# Altium PCB Filter_Bank_EVB.PcbDoc (part 2 of 2)
Units mil, origin at the board's own origin, x right, y up, seen from the top; angles counter-clockwise.
Board outline 1783.46 x 1173.23 mil, 4 copper layers (Top Layer, Mid-Layer 1, Mid-Layer 2, Bottom Layer), stack 62.205 mil thick; 71 components, 40 nets, 242 pads, 1145 vias.
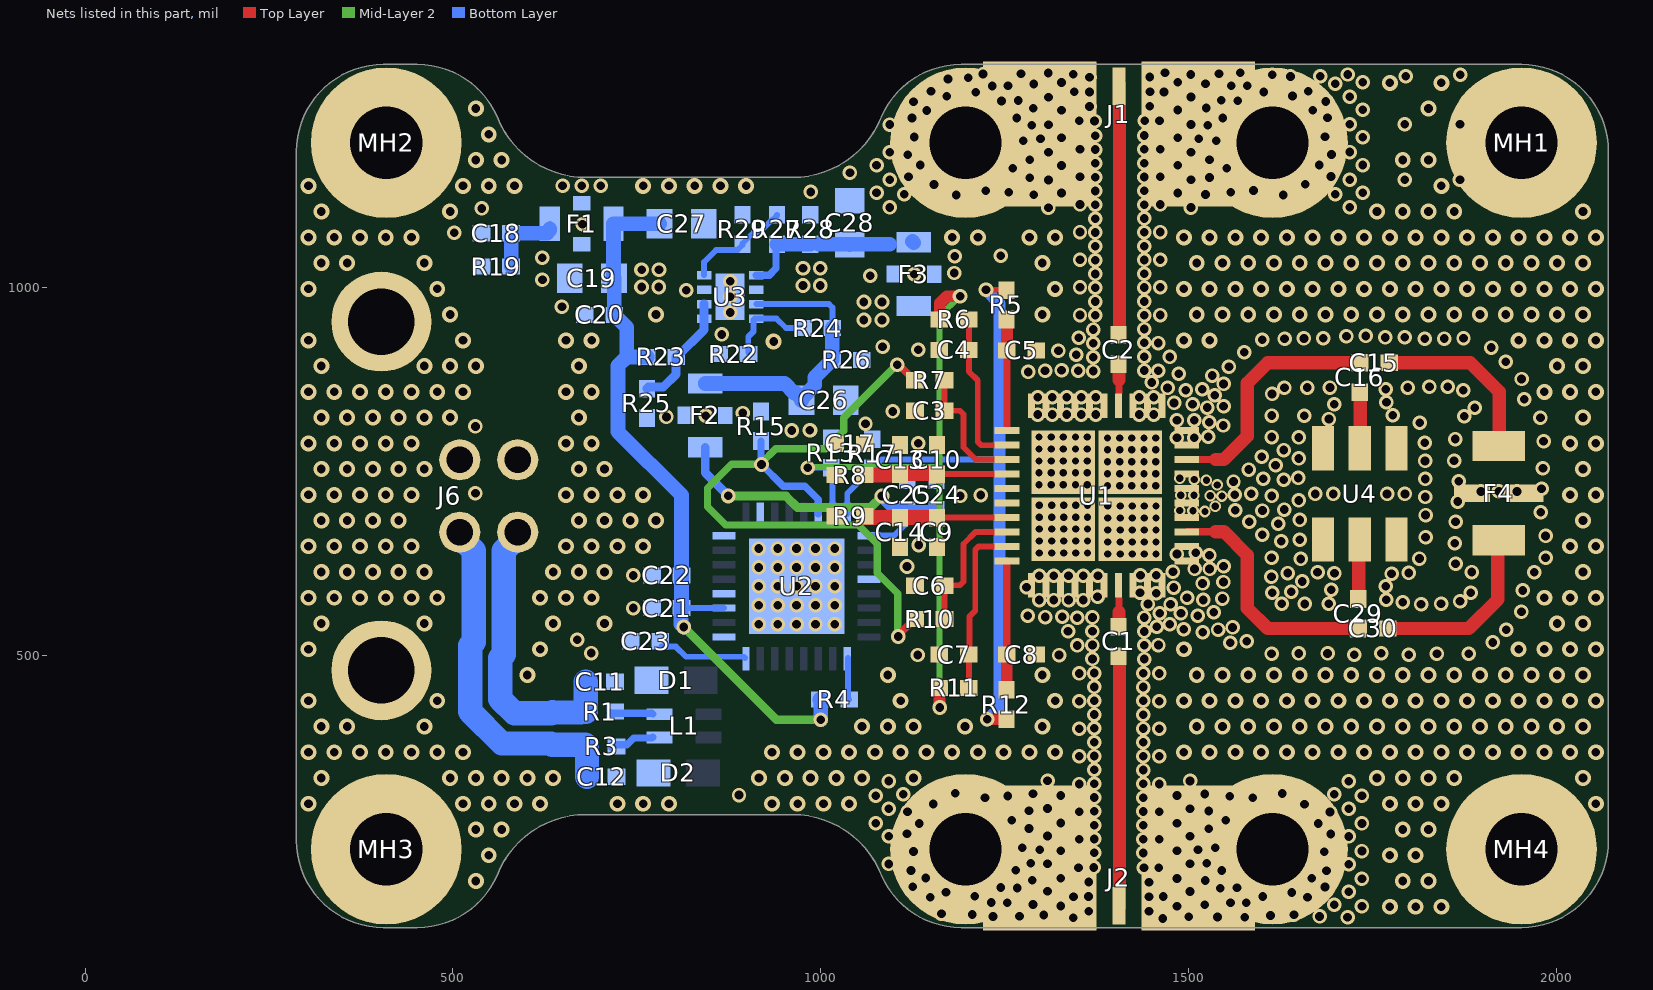
[diagram p4: the nets of this part, all layers, seen from the top]

## Via types
v1: diameter 19.68, hole 11.81, Top Layer to Bottom Layer, tented both sides, 562 vias
v2: diameter 21.68, hole 11.81, Top Layer to Bottom Layer, tented both sides, 377 vias
v3: diameter 15.75, hole 9.84, Top Layer to Bottom Layer, tented both sides, 112 vias
v4: diameter 19.68/19.68/19.68/19.68 (per signal layer), hole 11.81, Top Layer to Bottom Layer, tented both sides, 66 vias
v5: diameter 20.08, hole 11.81, Top Layer to Bottom Layer, tented both sides, 28 vias

## Nets (pads, with @x,y where several pads share a name; then routed paths per layer and width w, separated by ;. In a path a pad name is that pad's centre, name@x,y a point inside that pad or via, vN(x,y) a via of type N, cw(c..) or ccw(c..) an arc to the next point about the centre after c; other vN are vias at no path point) (continued)
GND: C3.2 C4.2 C5.2 C6.1 C7.1 C8.1 C9.1 C10.2 C11.1 C12.1 C13.1 C14.1 C17.2 C18.1 C19.1 C20.1 C21.1 C22.1 C23.1 C24.1 C25.1 C26.1 C27.1 C28.1 D1.2 D2.2 F1.2 F1.4 F2.2 F2.4 F3.2 F3.4 F4.2 F4.4 J1.2 J2.2 J6.4 J6.Shell MH1.1 MH2.1 MH3.1 MH4.1 R13.2 R15.2 R17.2 R22.2 R25.1 R26.1 R28.1 R29.2 U1.5 U1.6 U1.11 U1.12 U1.13 U1.14 U1.15 U1.16 U1.18 U1.19 U1.20 U1.21 U1.22 U1.24 U1.25 U1.26 U1.27 U1.29 U1.30 U1.31 U1.32 U1.33 U1.35 U1.36 U1.37 U1.38 U1.39 U1.40 U1.41 U1.42 U1.43 U1.44 U2.4 U2.17 U2.20 U2.24 U2.26 U2.33 U3.3 U3.9 U4.1 U4.3 U4.4 U4.6
  other v1: 1465.05,142.17 1343.18,143.04 1539.38,144.23 1576.55,144.01 1716.25,143.93 1234.28,144.86 1270.43,145.35 1500.28,144.74 1678.16,144.94 1611.56,146.23 1206.05,147.51 1303.32,147.05 1643.44,147.15 1164.22,148.77 1364.28,152.06 1446.32,151.85 1735.87,158.66 1326.27,159.17 1484.33,158.96 1288.59,161.26 1522.01,161.05 1698.2,160.75 1253.49,163.65 1557.11,163.44 1232,163.98 1578.6,163.77 1148.88,171.17 1343.65,171.65 1661.72,170.96 1209.5,172.42 1364.22,172.13 1446.38,171.93 1465.61,172.05 1601.11,172.21 1640.21,177.55 1170.39,177.76 1718.08,178.54 1308.48,179.05 1502.13,178.84 1267.45,183.67 1543.15,183.46 1244.66,184.23 1565.94,184.03 1125.09,185.28 1685.51,185.07 1446.26,191.61 1364.34,191.82 1287.63,194.03 1522.97,193.82 1484.33,196.54 1735.87,196.24 1142.82,197.18 1326.27,196.75 1667.79,196.97 1122.88,207.5 1265.2,207.59 1545.4,207.38 1687.72,207.29 1350.52,211.07 1371.09,211.56 1439.52,211.35 1459.52,211.07 1092.52,216.33 1308.48,216.63 1502.13,216.42 1718.08,216.12 1285.74,217.43 1524.86,217.22 1371.92,231.51 1438.69,231.3 1126.22,233.19 1684.39,232.98 1326.27,234.33 1484.33,234.12 1735.87,233.82 1512.95,235.48 1297.65,235.69 1274.2,238.53 1536.4,238.32 1351.35,249.81 1371.92,250.3 1438.69,250.09 1460.35,249.81 1092.52,253.91 1308.48,254.21 1502.13,254.01 1718.08,253.7 1117.27,257.27 1693.33,257.06 1283.21,264.42 1527.4,264.21 1371.92,269.09 1438.69,268.88 1074.73,271.61 1134.1,271.45 1676.51,271.24 1735.87,271.4 1326.27,271.91 1484.33,271.7 1259.86,275.95 1550.75,275.74 1118.11,287.13 1351.35,287.39 1438.69,287.67 1460.35,287.39 1692.49,286.92 1283.25,288.62 1371.92,287.88 1527.36,288.41 1092.52,291.5 1502.13,291.59 1718.08,291.29 1308.48,291.8 1657.66,297.69 1152.95,297.9 1223.28,306.34 1371.92,306.67 1438.69,306.46 1587.32,306.13 1254.51,308.59 1556.09,308.38 1074.73,309.2 1326.27,309.5 1484.33,309.29 1735.87,308.99 1112.4,311.29 1288.59,311.59 1522.01,311.38 1698.2,311.08 1183.05,312.25 1627.55,312.04 1351.35,324.98 1371.92,325.46 1438.69,325.25 1460.35,324.98 1092.52,329.08 1308.48,329.38 1502.13,329.17 1718.08,328.87 1371.92,344.25 1438.69,344.05 1351.35,362.56 1460.35,362.56 1371.92,363.05 1438.69,362.84 1438.69,381.63 1371.92,381.84 1351.35,400.14 1371.92,400.63 1438.69,400.42 1460.35,400.14 1371.92,419.42 1438.69,419.21 1351.35,437.72 1371.92,438.21 1438.69,438 1460.35,437.72 1371.92,457 1438.69,456.79 1351.35,475.31 1438.69,475.58 1460.35,475.31 1371.92,475.79 1369.49,495.07 1440,494.87 1725.46,500.75 1799.38,500.74 1612.99,502.3 1650.02,502.45 1689.11,502.45 1762.25,502.57 1837.75,502.1 1880.97,502.1 1348.92,513.38 1440,513.66 1369.49,513.86 1459.24,513.87 1556.61,517.08 1913.72,517.51 1579.33,519.06 1519.55,531.2 1336.25,532.68 1369.49,532.65 1440,532.46 1493.58,535.23 1540.22,534.98 1931.89,534.89 1559.89,537.83 1456.94,538.77 1474.72,542.13 1348.92,550.96 1369.49,551.44 1440,551.25 1305.16,551.95 1328.54,552.21 1512.74,553.63 1281.52,553.75 1460.78,557.04 1489.8,557.16 1534.2,558.44 1952.6,559.31 1475.69,569.26 1816.18,569.48 1444.91,569.7 1626.91,570 1657.99,569.83 1690.59,570.17 1843.35,570.03 1791.48,571.95 1869.15,573.33 1296.99,575.1 1316.99,575.1 1336.99,575.1 1356.99,575.1 1520.15,575.24 1768.91,575.44 1546.2,577.1 1498.12,578.27 1376.36,579.75 1455.99,584.45 1434.1,584.92 1613.87,585.07 1883.87,584.87 1639.54,586.18 1954.56,588.19 1694.02,589.1 1279.81,592.34 1479.92,592.11 1768.21,593.75 1519.11,597.63 1547.49,599.62 1654.6,600.33 1612.74,606.58 1296.99,608.27 1316.99,608.27 1336.99,608.27 1356.99,608.27 1376.99,608.27 1456.08,608.65 1434.68,608.89 1698.46,611.46 1776.1,610.88 1634.97,611.75 1799.43,611.93 1675.46,612.8 1884.97,613.14 1970,612.88 1478.94,613.75 1508.31,617.37 1528.69,617.37 1547.74,620.83 1863.05,624.33 1652.49,631 1813.93,631.47 1612.92,632.57 1985.44,632.59 1528.47,636.17 1484.29,637.59 1509.79,639.29 1861.96,652.39 1626.31,655.07 1651.2,656.9 1822.28,660.32 1985.44,662.19 1600.27,663.79 1622.06,678.6 1582.65,681.54 1863.05,681.55 1651.35,684.01 1822.3,690.65 1978.81,694.56 1563.53,697.22 1600.51,696.75 1630.28,698.16 1866.2,708.99 1649.79,710.5 1822.05,715.18 1613.27,716.59 1563.05,718.42 1672.32,719.34 1696.72,719.34 1769.92,719.34 1794.32,719.34 1585.21,719.71 1897.55,722.68 1922.07,722.68 1946.6,722.68 1980.02,726.3 1561.2,736.16 1867.39,736.67 1629.43,738.42 1601.65,740.12 1821.8,739.7 1649.38,741.11 1581.77,752.5 1981.92,754.4 1618.37,758.26 1821.55,764.23 1861.03,764.49 1649.93,767.61 1599.48,770.08 1629.43,778.96 1821.3,788.75 1982.67,790.88 1862.51,793.96 1484.29,795.77 1507.91,795.77 1613.01,796.62 1649.75,796.12 1526.79,796.98 1547.08,812.36 1814.25,816 1528.11,816.81 1484.29,819.39 1507.91,819.39 1690.96,821.17 1978.44,822.87 1657.19,825.57 1874.84,824.79 1613.11,825.85 1777.64,826.5 1295.31,827.26 1314.99,827.26 1334.68,827.26 1354.36,827.26 1374.05,827.26 1433.1,827.26 1452.79,827.26 1889.16,836.42 1525.6,836.82 1547.66,838.66 1505.51,841.27 1698.32,841.33 1480.35,843.01 1769.11,843.77 1956.6,847.97 1295.31,850.88 1314.99,850.88 1334.68,850.88 1354.36,850.88 1374.05,850.88 1433.1,850.88 1452.79,850.88 1535.79,853.53 1613.57,855.21 1496.4,860.27 1873.71,860.49 1518.73,861.53 1768.13,861.58 1471.54,863.43 1630.52,863.72 1661.42,863.91 1692.38,863.91 1798.29,863.92 1827.59,865.21 1852.59,864.89 1547.7,868.86 1450.29,870.9 1952.76,875.59 1532.23,880.28 1486.74,882.84 1282.19,885.12 1305.02,886.69 1370.69,886.4 1327.5,887.56 1350.12,886.88 1439.89,887.09 1459.12,886.88 1555.07,892.33 1931.29,899.04 1370.69,905.19 1474.71,905.57 1439.89,905.88 1347.32,908.61 1576,911.94 1911.45,918.35 1370.69,923.98 1439.89,924.67 1459.12,924.47 1600.37,929.06 1630.64,930.22 1656.98,930.65 1821.2,930.15 1847.54,930.58 1350.78,931.6 1683.32,931.09 1873.88,931.02 1767.66,932.02 1794,932.46 1714.73,933.69 1741.07,934.12 1370.69,942.77 1439.89,943.47 1352.55,962.53 1373.12,962.05 1439.89,962.26 1461.55,962.53 1373.12,980.84 1439.89,981.05 1373.12,999.63 1352.55,1000.12 1439.89,999.84 1461.55,1000.12 1373.12,1018.42 1439.89,1018.63 1373.12,1037.21 1439.89,1037.42 1352.55,1037.7 1461.55,1037.7 1373.12,1056 1439.89,1056.21 1352.55,1075.28 1373.12,1074.79 1439.89,1075 1461.55,1075.28 1373.12,1093.59 1439.89,1093.79 1309.68,1108.46 1503.33,1108.67 1093.72,1108.76 1719.28,1108.97 1373.12,1112.38 1439.89,1112.59 1352.55,1112.86 1461.55,1112.86 1184.25,1125.6 1113.6,1126.55 1289.79,1126.25 1523.21,1126.46 1628.75,1125.8 1699.4,1126.76 1075.93,1128.64 1327.47,1128.34 1485.54,1128.55 1255.71,1129.25 1557.29,1129.46 1737.07,1128.85 1224.48,1131.5 1373.12,1131.17 1439.89,1131.38 1588.52,1131.71 1154.15,1139.94 1658.86,1140.15 1093.72,1146.34 1309.68,1146.04 1503.33,1146.25 1719.28,1146.55 1793.86,1146.55 1869.02,1146.55 1284.45,1149.22 1528.56,1149.43 1352.55,1150.45 1373.12,1149.96 1439.89,1150.17 1461.55,1150.45 1119.31,1150.71 1693.69,1150.92 1261.06,1161.89 1551.95,1162.1 1075.93,1166.23 1135.3,1166.39 1327.47,1165.93 1485.54,1166.14 1677.71,1166.6 1737.07,1166.44 1373.12,1168.75 1439.89,1168.96 1284.41,1173.42 1528.6,1173.63 1118.47,1180.57 1694.53,1180.78 1309.68,1183.63 1093.72,1183.93 1503.33,1183.83 1719.28,1184.14 1373.12,1187.54 1352.55,1188.03 1439.89,1187.75 1461.55,1188.03 1275.4,1199.31 1537.6,1199.52 1298.85,1202.15 1514.15,1202.36 1327.47,1203.51 1127.42,1204.65 1485.54,1203.72 1737.07,1204.02 1685.59,1204.86 1373.12,1206.33 1439.89,1206.54 1286.94,1220.41 1526.06,1220.62 1093.72,1221.51 1309.68,1221.21 1503.33,1221.42 1719.28,1221.72 1793.86,1221.72 1869.02,1221.72 1372.29,1226.28 1440.72,1226.49 1351.72,1226.77 1460.72,1226.77 1124.08,1230.34 1266.4,1230.25 1546.6,1230.46 1688.92,1230.55 1144.02,1240.66 1327.47,1241.09 1485.54,1241.3 1668.99,1240.87 1737.07,1241.6 1288.83,1243.81 1524.17,1244.02 1365.54,1246.02 1447.46,1246.23 1126.29,1252.56 1245.86,1253.61 1686.71,1252.77 1268.65,1254.17 1544.35,1254.38 1567.14,1253.81 1309.68,1258.79 1503.33,1259 1719.28,1259.3 1171.59,1260.08 1641.41,1260.29 1210.7,1265.42 1602.31,1265.63 1150.08,1266.67 1344.85,1266.19 1365.42,1265.71 1447.58,1265.91 1466.81,1265.79 1662.92,1266.88 1233.2,1273.86 1254.69,1274.19 1558.31,1274.4 1579.8,1274.07 1289.79,1276.58 1523.21,1276.79 1699.4,1277.09 1327.47,1278.67 1485.54,1278.88 1737.07,1279.18 1173.23,1283.46 1200.5,1284.97 1365.48,1285.78 1447.52,1285.99 1638.67,1286.82 1679.02,1287.21 1795.16,1287.18 1503.26,1289.42 1613.7,1289.32 1716.67,1289.51 1869.48,1289.32 1220.76,1290.11 1343.52,1289.81 1541.55,1290.67 1272.46,1290.72 1309.35,1291.63 1468.11,1291.93 1570.42,1291.72
  other v2: 1773.78,158.19 1808.78,158.19 1843.78,158.19 531.28,193.19 1791.28,193.19 1826.28,193.19 548.78,228.19 1773.78,228.19 1808.78,228.19 531.28,263.19 566.28,263.19 1791.28,263.19 1826.28,263.19 303.78,298.19 513.78,298.19 548.78,298.19 583.78,298.19 618.78,298.19 723.78,298.19 758.78,298.19 793.78,298.19 933.78,298.19 968.78,298.19 1003.78,298.19 1038.78,298.19 1773.78,298.19 1808.78,298.19 1843.78,298.19 2053.78,298.19 321.28,333.19 496.28,333.19 531.28,333.19 566.28,333.19 601.28,333.19 636.28,333.19 916.28,333.19 951.28,333.19 986.28,333.19 1021.28,333.19 1056.28,333.19 1126.28,333.19 1756.28,333.19 1791.28,333.19 1826.28,333.19 1861.28,333.19 2036.28,333.19 303.78,368.19 338.78,368.19 373.78,368.19 408.78,368.19 443.78,368.19 478.78,368.19 513.78,368.19 933.78,368.19 968.78,368.19 1003.78,368.19 1038.78,368.19 1073.78,368.19 1108.78,368.19 1143.78,368.19 1178.78,368.19 1213.78,368.19 1248.78,368.19 1283.78,368.19 1318.78,368.19 1493.78,368.19 1528.78,368.19 1563.78,368.19 1598.78,368.19 1633.78,368.19 1668.78,368.19 1703.78,368.19 1738.78,368.19 1773.78,368.19 1808.78,368.19 1843.78,368.19 1878.78,368.19 1913.78,368.19 1948.78,368.19 1983.78,368.19 2018.78,368.19 2053.78,368.19 321.28,403.19 356.28,403.19 461.28,403.19 1056.28,403.19 1091.28,403.19 1126.28,403.19 1196.28,403.19 1301.28,403.19 1511.28,403.19 1546.28,403.19 1581.28,403.19 1616.28,403.19 1651.28,403.19 1686.28,403.19 1721.28,403.19 1756.28,403.19 1791.28,403.19 1826.28,403.19 1861.28,403.19 1896.28,403.19 1931.28,403.19 1966.28,403.19 2001.28,403.19 2036.28,403.19 303.78,438.19 478.78,438.19 1108.78,438.19 1318.78,438.19 1493.78,438.19 1528.78,438.19 1563.78,438.19 1598.78,438.19 1633.78,438.19 1668.78,438.19 1703.78,438.19 1738.78,438.19 1773.78,438.19 1808.78,438.19 1843.78,438.19 1878.78,438.19 1913.78,438.19 1948.78,438.19 1983.78,438.19 2018.78,438.19 2053.78,438.19 601.28,473.19 1091.28,473.19 1301.28,473.19 1511.28,473.19 1546.28,473.19 1581.28,473.19 1616.28,473.19 1651.28,473.19 1686.28,473.19 1721.28,473.19 1756.28,473.19 1791.28,473.19 1826.28,473.19 1861.28,473.19 1896.28,473.19 1931.28,473.19 1966.28,473.19 2001.28,473.19 2036.28,473.19 303.78,508.19 618.78,508.19 1493.78,508.19 1948.78,508.19 1983.78,508.19 2018.78,508.19 2053.78,508.19 321.28,543.19 461.28,543.19 636.28,543.19 706.28,543.19 2001.28,543.19 2036.28,543.19 303.78,578.19 338.78,578.19 373.78,578.19 408.78,578.19 443.78,578.19 478.78,578.19 618.78,578.19 653.78,578.19 688.78,578.19 1983.78,578.19 2018.78,578.19 2053.78,578.19 321.28,613.19 356.28,613.19 391.28,613.19 426.28,613.19 461.28,613.19 636.28,613.19 671.28,613.19 706.28,613.19 2036.28,613.19 303.78,648.19 338.78,648.19 373.78,648.19 408.78,648.19 443.78,648.19 653.78,648.19 688.78,648.19 723.78,648.19 758.78,648.19 2018.78,648.19 2053.78,648.19 321.28,683.19 356.28,683.19 391.28,683.19 426.28,683.19 671.28,683.19 706.28,683.19 741.28,683.19 776.28,683.19 2036.28,683.19 303.78,718.19 338.78,718.19 373.78,718.19 408.78,718.19 443.78,718.19 653.78,718.19 688.78,718.19 723.78,718.19 758.78,718.19 2018.78,718.19 2053.78,718.19 321.28,753.19 356.28,753.19 391.28,753.19 426.28,753.19 461.28,753.19 671.28,753.19 706.28,753.19 2036.28,753.19 303.78,788.19 338.78,788.19 373.78,788.19 408.78,788.19 443.78,788.19 653.78,788.19 688.78,788.19 2018.78,788.19 2053.78,788.19 321.28,823.19 356.28,823.19 391.28,823.19 426.28,823.19 461.28,823.19 496.28,823.19 671.28,823.19 2036.28,823.19 303.78,858.19 338.78,858.19 373.78,858.19 408.78,858.19 443.78,858.19 478.78,858.19 513.78,858.19 653.78,858.19 688.78,858.19 1983.78,858.19 2018.78,858.19 2053.78,858.19 321.28,893.19 461.28,893.19 496.28,893.19 531.28,893.19 671.28,893.19 2001.28,893.19 2036.28,893.19 936.04,926.49 303.78,928.19 513.78,928.19 653.78,928.19 688.78,928.19 1493.78,928.19 1528.78,928.19 1948.78,928.19 1983.78,928.19 2018.78,928.19 2053.78,928.19 496.28,963.19 776.28,963.19 1301.28,963.19 1511.28,963.19 1546.28,963.19 1581.28,963.19 1616.28,963.19 1651.28,963.19 1686.28,963.19 1721.28,963.19 1756.28,963.19 1791.28,963.19 1826.28,963.19 1861.28,963.19 1896.28,963.19 1931.28,963.19 1966.28,963.19 2001.28,963.19 2036.28,963.19 303.78,998.19 478.78,998.19 1318.78,998.19 1493.78,998.19 1528.78,998.19 1563.78,998.19 1598.78,998.19 1633.78,998.19 1668.78,998.19 1703.78,998.19 1738.78,998.19 1773.78,998.19 1808.78,998.19 1843.78,998.19 1878.78,998.19 1913.78,998.19 1948.78,998.19 1983.78,998.19 2018.78,998.19 2053.78,998.19 321.28,1033.19 356.28,1033.19 461.28,1033.19 1301.28,1033.19 1511.28,1033.19 1546.28,1033.19 1581.28,1033.19 1616.28,1033.19 1651.28,1033.19 1686.28,1033.19 1721.28,1033.19 1756.28,1033.19 1791.28,1033.19 1826.28,1033.19 1861.28,1033.19 1896.28,1033.19 1931.28,1033.19 1966.28,1033.19 2001.28,1033.19 2036.28,1033.19 303.78,1068.19 338.78,1068.19 373.78,1068.19 408.78,1068.19 443.78,1068.19 1178.78,1068.19 1213.78,1068.19 1283.78,1068.19 1318.78,1068.19 1493.78,1068.19 1528.78,1068.19 1563.78,1068.19 1598.78,1068.19 1633.78,1068.19 1668.78,1068.19 1703.78,1068.19 1738.78,1068.19 1773.78,1068.19 1808.78,1068.19 1843.78,1068.19 1878.78,1068.19 1913.78,1068.19 1948.78,1068.19 1983.78,1068.19 2018.78,1068.19 2053.78,1068.19 321.28,1103.19 496.28,1103.19 1756.28,1103.19 1791.28,1103.19 1826.28,1103.19 1861.28,1103.19 2036.28,1103.19 303.78,1138.19 513.78,1138.19 548.78,1138.19 583.78,1138.19 758.78,1138.19 793.78,1138.19 828.78,1138.19 863.78,1138.19 898.78,1138.19 1843.78,1138.19 531.28,1173.19 566.28,1173.19 1791.28,1173.19 1826.28,1173.19 548.78,1208.19 531.28,1243.19 1826.28,1243.19 1773.78,1278.19 1843.78,1278.19
  other v3: 1390.39,637.83 1407.18,637.83 1423.59,637.83 1439.99,637.83 1456,637.83 1297.28,639.01 1314.07,639.01 1330.49,639.01 1346.88,639.01 1362.89,639.01 1390.39,654.12 1407.18,654.12 1423.59,654.12 1439.99,654.12 1456,654.12 1297.28,655.3 1314.07,655.3 1330.49,655.3 1346.88,655.3 1362.89,655.3 1390.39,670.4 1407.18,670.4 1423.59,670.4 1439.99,670.4 1456,670.4 1297.28,671.58 1314.07,671.58 1330.49,671.58 1346.88,671.58 1362.89,671.58 1390.39,686.57 1407.18,686.57 1423.59,686.57 1439.99,686.57 1456,686.57 1297.28,687.75 1314.07,687.75 1330.49,687.75 1346.88,687.75 1362.89,687.75 1522.38,695.44 1506.18,696.56 1488.3,696.7 1536.52,702.63 1390.39,702.86 1407.18,702.86 1423.59,702.86 1439.99,702.86 1456,702.86 1297.28,704.04 1314.07,704.04 1330.49,704.04 1346.88,704.04 1362.89,704.04 1545.48,716.44 1489.52,717.55 1507.4,717.42 1529.57,716.99 1389.83,730.52 1406.62,730.52 1423.04,730.52 1439.43,730.52 1455.44,730.52 1539.18,731.66 1296.73,731.7 1313.52,731.7 1329.93,731.7 1346.32,731.7 1362.33,731.7 1524.4,737.88 1507.81,738.95 1488.22,740.65 1389.83,746.8 1406.62,746.8 1423.04,746.8 1439.43,746.8 1455.44,746.8 1296.73,747.98 1313.52,747.98 1329.93,747.98 1346.32,747.98 1362.33,747.98 1389.83,763.09 1406.62,763.09 1423.04,763.09 1439.43,763.09 1455.44,763.09 1296.73,764.27 1313.52,764.27 1329.93,764.27 1346.32,764.27 1362.33,764.27 1389.83,779.26 1406.62,779.26 1423.04,779.26 1439.43,779.26 1455.44,779.26 1296.73,780.44 1313.52,780.44 1329.93,780.44 1346.32,780.44 1362.33,780.44 1389.83,795.54 1406.62,795.54 1423.04,795.54 1439.43,795.54 1455.44,795.54 1296.73,796.72 1313.52,796.72 1329.93,796.72 1346.32,796.72 1362.33,796.72
  other v4: 889,310 1132.13,500.4 1324.02,500.31 688,503 669,521 915.76,542.16 941.5,542.16 967.25,542.16 992.99,542.16 1019.32,542.16 745.04,564.24 915.76,567.91 941.5,567.91 967.25,567.91 992.99,567.91 1019.32,567.91 915.76,593.65 941.5,593.65 967.25,593.65 992.99,593.65 1019.32,593.65 745.04,608.53 915.76,619.39 941.5,619.39 967.25,619.39 992.99,619.39 1019.32,619.39 915.76,645.14 941.5,645.14 967.25,645.14 992.99,645.14 1019.32,645.14 1189.57,716.54 1217.74,717.78 530.71,720.47 1132.49,788.33 530.71,811.02 1060.95,814.83 790.33,823.97 843.73,825.79 894.25,829.36 1097.85,831.42 1323.19,914.19 1132.46,915.35 1084.1,919.35 865.59,936.1 876.97,966.09 648.31,973.63 876.97,987.21 817.37,996.43 876.97,1008.32 621.82,1010.64 1067.52,1015.75 1127.19,1017.95 1181.69,1019.69 621.37,1040.42 1182.32,1042.65 1244.68,1043.31 501.86,1074.48 676.32,1085.76 539.27,1107.41 986.65,1129.8 649.19,1138.26 675.07,1138.26 700.96,1138.26 1039.81,1155.85
  other v5: 1117.4,620.66 1133.44,649.8
NetC3_1: C3.1 R7.2 U1.3 | length 180.1
  Top Layer w8: R7.2@1168.34,873.77 C3.1@1168.34,832.39 1189.5,832.39 1194.18,827.7 1194.18,782.79 1210.73,766.24 U1.3@1253.38,766.24
NetC4_1: C4.1 R6.2 U1.2 | length 216.9
  Top Layer w8: R6.2@1201.41,956.54 C4.1@1201.41,915.21 1201.41,885.79 1213.52,873.69 1213.52,790.24 1218.21,785.55 U1.2@1257.17,785.55
NetC5_1: C5.1 R5.2 U1.1 | length 150.2
  Top Layer w10: C5.1@1253.23,914.37 1253.23,805.76 U1.1@1253.38,805.61
  Top Layer w16: C5.1@1253.23,914.37 R5.2@1253.23,955.71
NetC6_2: C6.2 R10.2 U1.8 | length 190.8
  Top Layer w8: R10.2@1168.34,549.21 C6.2@1168.34,594.49 1169.09,595.24 1189.5,595.24 1194.18,599.93 1194.18,651.26 1210.73,667.81 U1.8@1253.38,667.81
NetC7_2: C7.2 R11.2 U1.9 | length 240.2
  Top Layer w8: R11.2@1201.41,451.99 C7.2@1201.41,500.99 1202.14,501.71 1202.14,552.41 1210.18,560.45 1210.18,643.44 1214.87,648.13 U1.9@1253.38,648.13
NetC8_2: C8.2 R12.2 U1.10 | length 172.9
  Top Layer w10: R12.2@1252.44,453.19 R12.2@1252.56,453.07 ; C8.2@1252.99,500.87 C8.2@1253.1,500.99 1253.1,628.17 U1.10@1253.38,628.44
  Top Layer w16: R12.2@1252.99,455.82 C8.2@1252.99,500.87
NetC9_2: C9.2 C14.2 R9.2 U1.7 | length 195.9
  Top Layer w8: C14.2@1107.93,687.2 C14.2@1108.23,687.5 ; C9.2@1158.07,687.2 1158.37,687.5 U1.7@1253.38,687.5
  Top Layer w20: R9.2@1057.96,687.2 C14.2@1107.93,687.2 ; C14.2@1108.01,687.2 C9.2@1158.07,687.2
NetC10_1: C10.1 C13.2 R8.2 U1.4 | length 191.9
  Top Layer w8: C10.1@1158.07,747.84 1159.36,746.55 U1.4@1253.38,746.55
  Top Layer w20: R8.2@1062.48,745.08 C13.2@1107.13,745.08 ; C13.2@1107.93,745.87 C13.2@1109.1,747.05 ; C13.2@1108.93,747.05 C13.2@1109.1,747.05 ; C10.1@1158.07,745.87 1158.07,746.05 1157.07,747.05 C13.2@1109.1,747.05
NetC18_2: C18.2 F1.1 R19.1 | length 106.8
  Bottom Layer w8: R19.1@579.05,1028.37 R19.1@579.37,1028.69 ; F1.1@622.11,1069.71 626.22,1073.82 631.89,1079.49 F1.1@631.89,1086.62
  Bottom Layer w20: R19.1@579.37,1028.69 579.37,1069.71 C18.2@580.37,1070.71 ; 592.34,1073.82 626.22,1073.82 628.11,1073.82 631.89,1077.6 F1.1@631.89,1079.49
NetC23_2: C23.2 U2.16 | length 119.6
  Bottom Layer w8: C23.2@783.78,511.81 803.15,511.81 816.93,498.03 895.48,498.03 U2.16@897.01,496.5
NetC26_2: C26.2 F2.1 R24.2 R26.2 U3.7 | length 391.6
  Bottom Layer w8: U3.7@912.4,977.36 1011.25,977.36 1015.94,972.68 R24.2@1015.94,944.88
  Bottom Layer w20: F2.1@843.06,869.51 950.88,869.51 963.94,856.46 966.44,856.46 C26.2@973.94,848.96 ; R24.2@1015.94,944.88 1015.84,944.79 1015.84,901.67 1014.84,901.67 1013.75,900.58 1013.75,899.58 992.13,877.95 992.13,867.15 C26.2@973.94,848.96 ; C26.2@973.94,848.96 C26.2@973.94,846.46 C26.2@973.94,848.96
NetC28_2: C28.2 F3.1 R27.2 R28.2 U3.5 | length 205.3
  Bottom Layer w10: U3.5@912.4,1016.73 930.12,1016.73 939.3,1025.91 R27.2@939.3,1055.98 ; F3.1@1126.38,1061.68 F3.1@1126.6,1061.46
  Bottom Layer w20: R27.2@940.58,1058.83 R28.2@985.75,1058.83 ; 997.56,1058.83 1094.06,1058.83 ; C28.2@1039.47,1058.08 C28.2@1039.65,1057.91 ; F3.1@1124.93,1062.56 F3.1@1126.54,1060.95
NetL1_1: L1.1 R3.1 | length 61.6
  Bottom Layer w10: R3.1@715.8,374.88 719.15,378.23 736.65,378.23 746.02,387.61 770.48,387.61 L1.1@771.65,388.78
NetL1_4: L1.4 R1.1 | length 58.6
  Bottom Layer w10: R1.1@713.83,422.12 714.75,421.2 770.73,421.2 L1.4@771.65,420.28
NetR4_2: R4.2 U2.9 | length 57.2
  Bottom Layer w8: U2.9@1037.04,496.5 1037.04,441.62 R4.2@1038.7,439.96
NetR22_1: R22.1 R24.1 U3.8 | length 120.7
  Bottom Layer w8: R22.1@901.57,911.51 901.57,933.07 908.45,939.95 908.45,955.77 910.36,957.68 939.96,957.68 952.76,944.88 R24.1@975.94,944.88
NetR23_2: R23.2 R25.2 U3.1 U3.2 | length 159.3
  Bottom Layer w12: R25.2@763.78,862.52 765.75,864.49 785.75,864.49 803.46,882.21 R23.2@803.46,905.51 804.46,905.51 841.54,942.58 U3.1@841.54,957.68 U3.2@841.54,977.36
NetR27_1: R27.1 R29.1 U3.4 | length 145.2
  Bottom Layer w8: U3.4@841.54,1016.73 841.54,1034.45 857.92,1050.83 886.7,1050.83 893.7,1057.83 893.7,1059.83 908.7,1074.83 916.58,1074.83 932.58,1090.83 933.58,1090.83 940.58,1097.83 R27.1@940.58,1098.83
RF1_1: C1.2 U1.17 | length 37.7
  Top Layer w10: 1405.61,558.8 1405.61,576.5
  Top Layer w18: C1.2@1405.61,538.8 1405.61,558.8
RF1_2: C1.1 J2.1 | length 342.1
  Top Layer w18: C1.1@1405.61,498.8 1406.15,498.26 J2.1@1406.15,156.88
RF2_1: C2.1 U1.34 | length 38.3
  Top Layer w10: 1405.51,857.34 1405.55,857.38 1405.55,874.51 ; C2.1@1405.55,895.5 C2.1@1405.61,895.56
  Top Layer w18: 1405.55,874.51 C2.1@1405.55,895.5
RF2_2: C2.2 J1.1 | length 341.5
  Top Layer w18: C2.2@1405.61,935.56 1406.15,936.1 J1.1@1406.15,1276.88
RFAUX2_1: C15.2 C16.2 U1.28 | length 330.1
  Top Layer w10: U1.28@1498.07,766.24 1536.63,766.24
  Top Layer w18: 1536.63,766.24 1548.3,766.24 1579.92,797.85 1579.92,870.08 1607.48,897.64 C16.2@1731.46,897.64
RFAUX2_2: C16.1 U4.5 | length 76.2
  Top Layer w18: U4.5@1733.46,781.48 C16.1@1733.46,857.64
RFAUX2_3: C15.1 F4.3 | length 239.1
  Top Layer w18: C15.1@1773.46,897.64 1883.07,897.64 1922.44,858.27 F4.3@1922.44,784.47
RFAUX_1: C29.2 C30.1 U1.23 | length 330.1
  Top Layer w10: U1.23@1498.07,667.81 1536.63,667.81
  Top Layer w18: 1536.63,667.81 1548.3,667.81 1579.92,636.2 1579.92,563.97 1607.48,536.41 C30.1@1731.46,536.41
RFAUX_2: C29.1 U4.2 | length 81.9
  Top Layer w8: U4.2@1731.46,655.48 U4.2@1733.46,657.48
  Top Layer w18: C29.1@1731.46,576.41 U4.2@1731.46,655.48
RFAUX_3: C30.2 F4.1 | length 239.1
  Top Layer w18: C30.2@1771.46,536.41 1881.07,536.41 1920.44,575.78 F4.1@1920.44,649.58
USB1_N: C11.2 J6.2 R1.2 | length 395.4
  Bottom Layer w33: J6.2@588.19,667.32 588.19,661.12 569.32,642.25 569.32,501.04 564.51,496.23 564.51,440.43 583.84,421.1 633.93,421.1 635.33,422.5 635.7,422.12 R1.2@673.83,422.12 ; R1.2@680.53,423.4 C11.2@680.53,464
USB1_P: C12.2 J6.3 R3.2 | length 470
  Bottom Layer w33: J6.3@509.45,667.32 509.45,661.12 528.32,642.25 528.32,518.02 523.51,513.21 523.51,423.45 566.86,380.1 633.42,380.1 634.97,378.55 R3.2@680.1,378.55 ; C12.2@682.5,335 R3.2@682.5,376.16
VBUS: J6.1 R19.2
VCC: C19.2 C20.2 C21.2 C22.2 C27.2 F1.3 R4.1 R23.1 U2.19 U3.6 | length 1009.5
  Mid-Layer 2 w12: v5(813.98,538.39) 939.96,412.4 v5(1000,412.4)
  Bottom Layer w8: C21.2@815.2,564.12 U2.19@868.82,564.12
  Bottom Layer w20: R23.1@764.46,905.51 R23.1@763.46,905.51 736.22,905.51 ; C27.2@781.02,1086.62 F1.3@718.5,1086.62 718.5,1013.27 C19.2@718.98,1012.8 719.23,1012.54 719.23,962.86 720.23,962.86 721.49,961.6 721.49,960.6 736.22,945.87 736.22,905.51 ; C22.2@810.5,611.25 810.96,610.79 810.96,568.36 810.03,567.43 810.19,567.26 810.19,542.17 v5(813.98,538.39) ; C22.2@810.96,611.72 810.96,717.59 724.41,804.14 724.41,893.7 736.22,905.51 ; R4.1@998.7,439.96 998.98,439.96 999.98,438.96 v5(1000,412.4)
  other v5: 756.6,1000.65 779.95,1000.65 975.95,1002.77 999.3,1002.77 756.6,1024 780.22,1024 975.95,1026.12 999.57,1026.12
VCONTA: R7.1 R10.1 R15.1 U2.30 | length 961.3
  Top Layer w10: v5(1104.06,895.06) 1106.05,895.06 1127.34,873.77 R7.1@1128.34,873.77 ; v5(1105.56,525.45) 1105.56,527.44 1127.34,549.21 R10.1@1128.34,549.21
  Mid-Layer 2 w10: v5@911.3,759.64 878.86,759.64 846.24,727.02 846.24,701.8 870.87,677.17 1051.18,677.17 1077.11,651.23 1077.11,611.86 1104.97,584 v5@1104.97,525.45 ; v5(919.54,759.35) 919.54,761.37 938.78,780.61 1006.81,780.61 1031.5,805.3 1031.5,823.08 v5@1103.47,895.06
  Bottom Layer w10: R15.1@918.92,791.39 v5@918.92,759.97 ; v5(919.54,759.35) v5@918.92,759.97 ; U2.30@996.77,692.08 996.69,692.15 996.69,711.82 978.63,729.88 949,729.88 v5@918.92,759.97
VCONTB: R6.1 R11.1 R13.1 U2.31 | length 926.5
  Top Layer w16: R11.1@1161.41,455.71 1161.71,455.41 1161.71,429.43 v5(1162.01,429.13) ; R6.1@1161.41,956.54 1162.01,957.14 1162.01,978.82 1171.38,988.19 v5(1189.57,988.19)
  Mid-Layer 2 w8: v5(982.34,755.02) 983.23,755.91 1161.42,755.91 ; v5@1161.42,429.13 1161.42,755.91 ; v5@1188.98,988.19 1161.42,960.63 1161.42,755.91
  Bottom Layer w8: v5(982.34,755.02) 1014.39,755.02 1016.11,753.31 1016.11,692.43 U2.31@1016.46,692.08
VCONTC: R5.1 R12.1 R17.1 U2.32 | length 910.3
  Top Layer w8: v5(1224.78,996.9) 1252.04,996.9 R5.1@1252.56,996.38
  Top Layer w16: v5(1226.56,412.93) 1252.42,412.93 R12.1@1252.56,413.07 R12.1@1252.87,413.39
  Bottom Layer w8: U2.32@1036.14,692.08 1036.14,719.82 1062.19,745.87 1063.19,745.87 1070.19,752.87 R17.1@1070.19,753.87 1070.19,754.87 1077.19,761.87 1078.19,761.87 1082.56,766.24 1242.99,766.24
  Bottom Layer w16: v5@1224.19,996.9 1242.99,978.11 1242.99,766.24 1242.99,428.95 v5@1225.27,411.23
VDD_FILTER: C17.1 F3.3 R8.1 R9.1
  other v5: 960.69,805.67 985.38,805.81 1058.76,955.81 1083.27,955.81 1058.76,980.32 1083.27,980.32
VDDIO: C24.2 C25.2 F2.3 U2.1 | length 462.7
  Mid-Layer 2 w12: v5@874.01,716.53 952.76,716.53 968.31,700.98 1068.18,700.98 1082.68,715.48 v5@1082.68,716.54
  Bottom Layer w8: U2.1@1065.67,662.55 1066.02,662.9 1099.91,662.9 1117.67,680.66 C25.2@1117.67,698.05
  Bottom Layer w12: F2.3@843.06,782.9 843.06,748.04 v5(874.39,716.71) ; v5@1082.68,716.54 1084.22,714.99 1084.22,711.55 1095.7,700.07 1115.65,700.07 C25.2@1117.67,698.05 C24.2@1157.48,698.05
  other v5: 1083.27,716.54
pads on no net: U2.2 U2.3 U2.5 U2.6 U2.7 U2.8 U2.10 U2.11 U2.12 U2.13 U2.18 U2.21 U2.22 U2.23 U2.25 U2.27 U2.28 U2.29

## Polygon pours and split planes (outlines as drawn)
GND on Mid-Layer 1 "Mid-Layer 1-GND" (solid, pour order 1): 405.51,129.92 451.85,129.92 ccw(c451.85,248.03) 560.1,200.79 cw(c681.1,153.54) 681.1,283.44 961.69,283.44 cw(c961.69,153.54) 1082.69,200.79 ccw(c1190.94,248.03) 1190.94,129.92 1484.25,129.92 1952.76,129.92 ccw(c1952.76,248.03) 2070.87,248.03 2070.87,1185.04 ccw(c1952.76,1185.04) 1952.76,1303.15 1952.75,1303.15 1190.94,1303.15 ccw(c1190.94,1185.04) 1082.69,1232.28 cw(c961.69,1279.53) 961.69,1149.63 681.1,1149.63 cw(c681.1,1279.53) 560.1,1232.28 ccw(c451.85,1185.04) 451.85,1303.15 405.51,1303.15 ccw(c405.51,1185.04) 287.4,1185.04 287.46,1090.55 287.46,248.03 287.4,248.03 ccw(c405.51,248.03)
GND on Mid-Layer 2 "Mid-Layer 2-GND" (solid, pour order 2): 405.51,129.92 451.85,129.92 ccw(c451.85,248.03) 560.1,200.79 cw(c681.1,153.54) 681.1,283.44 961.69,283.44 cw(c961.69,153.54) 1082.69,200.79 ccw(c1190.94,248.03) 1190.94,129.92 1484.25,129.92 1952.76,129.92 ccw(c1952.76,248.03) 2070.87,248.03 2070.87,1185.04 ccw(c1952.76,1185.04) 1952.76,1303.15 1952.75,1303.15 1190.94,1303.15 ccw(c1190.94,1185.04) 1082.69,1232.28 cw(c961.69,1279.53) 961.69,1149.63 681.1,1149.63 cw(c681.1,1279.53) 560.1,1232.28 ccw(c451.85,1185.04) 451.85,1303.15 405.51,1303.15 ccw(c405.51,1185.04) 287.4,1185.04 287.46,1090.55 287.46,248.03 287.4,248.03 ccw(c405.51,248.03)
GND on Bottom Layer "Bottom Layer-GND" (solid, pour order 3): 405.51,129.92 451.85,129.92 ccw(c451.85,248.03) 560.1,200.79 cw(c681.1,153.54) 681.1,283.44 961.69,283.44 cw(c961.69,153.54) 1082.69,200.79 ccw(c1190.94,248.03) 1190.94,129.92 1484.25,129.92 1952.76,129.92 ccw(c1952.76,248.03) 2070.87,248.03 2070.87,1185.04 ccw(c1952.76,1185.04) 1952.76,1303.15 1952.75,1303.15 1190.94,1303.15 ccw(c1190.94,1185.04) 1082.69,1232.28 cw(c961.69,1279.53) 961.69,1149.63 681.1,1149.63 cw(c681.1,1279.53) 560.1,1232.28 ccw(c451.85,1185.04) 451.85,1303.15 405.51,1303.15 ccw(c405.51,1185.04) 287.4,1185.04 287.46,1090.55 287.46,248.03 287.4,248.03 ccw(c405.51,248.03)
GND on Top Layer "Top Layer-GND" (solid, pour order 0): 405.51,129.92 451.85,129.92 ccw(c451.85,248.03) 560.1,200.79 cw(c681.1,153.54) 681.1,283.44 961.69,283.44 cw(c961.69,153.54) 1082.69,200.79 ccw(c1190.94,248.03) 1190.94,129.92 1484.25,129.92 1952.76,129.92 ccw(c1952.76,248.03) 2070.87,248.03 2070.87,1185.04 ccw(c1952.76,1185.04) 1952.76,1303.15 1952.75,1303.15 1190.94,1303.15 ccw(c1190.94,1185.04) 1082.69,1232.28 cw(c961.69,1279.53) 961.69,1149.63 681.1,1149.63 cw(c681.1,1279.53) 560.1,1232.28 ccw(c451.85,1185.04) 451.85,1303.15 405.51,1303.15 ccw(c405.51,1185.04) 287.4,1185.04 287.46,1090.55 287.46,248.03 287.4,248.03 ccw(c405.51,248.03)

## Other copper
Top Layer:
  region net VDD_FILTER: 947.22,793.6 980.87,793.6 1003.94,770.53 1003.94,677.17 1030.56,677.17 1031.37,677.98 1031.37,818.97 947.22,818.97
Mid-Layer 2:
  region net VCC: 972.44,984.25 930.03,1026.66 807.98,1026.66 807.09,1027.56 787.4,1007.87 744.09,1007.87 744.09,1060.91 981.5,1060.91 1015.75,1026.66 1015.75,984.25
  region net VDD_FILTER: 1098.42,992.13 1043.31,992.13 947.14,895.96 947.14,793.61 998.75,793.61 998.75,884.57 1055.12,940.95 1098.42,940.95
Bottom Layer:
  region net VDD_FILTER: 1043.31,940.95 1130.35,940.95 1150.63,961.22 1150.36,992.13 1043.31,992.13
  region net VBUS: 559.06,736.22 618.11,736.22 618.11,937.01 551.05,1004.06 551.05,1039.37 523.65,1039.37 523.78,948.66 559.05,913.39
  region net VCC: 718.5,1034.8 792.43,1035.12 792.43,988.19 719.23,988.19 719.23,1034.07
  region net VCC: 912.4,1002.59 935.05,1002.72 969.5,1037.18 1011.2,1037.18 1011.2,991.19 922.22,991.19 912.4,991.19

## Silkscreen, mask and mechanical layers (free items; w line width, h text height)
Top Overlay:
  lines w10: 1046.99,825.45 1086.56,804.64
Top Solder:
  circle w10: c551.18,1023.62 r39.37
  circle w10: c807.09,748.03 r39.37
  region: 287.46,1090.55 287.4,1185.04 cw(c405.51,1185.04) 405.51,1303.15 451.85,1303.15 cw(c451.85,1185.04) 560.1,1232.28 ccw(c681.1,1279.53) 681.1,1149.63 593.04,1149.63 ccw(c593.04,944.9) 472.31,1110.24 cw(c411.95,1192.91) 411.95,1090.55
  region: 287.4,248.03 ccw(c405.51,248.03) 405.51,129.92 451.85,129.92 ccw(c451.85,248.03) 560.1,200.79 cw(c681.1,153.54) 681.1,283.44 593.04,283.44 cw(c593.04,488.16) 472.31,322.83 472.31,322.82 ccw(c411.95,240.16) 411.95,342.52 287.46,342.52
  region: 961.69,283.44 cw(c961.69,153.54) 1082.69,200.79 ccw(c1190.94,248.03) 1190.94,129.92 1484.25,129.92 1952.76,129.92 ccw(c1952.76,248.03) 2070.87,248.03 2070.87,1185.04 ccw(c1952.76,1185.04) 1952.76,1303.15 1952.75,1303.15 1190.94,1303.15 ccw(c1190.94,1185.04) 1082.69,1232.28 cw(c961.69,1279.53) 961.69,1149.63 1018.26,1149.63 cw(c1018.26,944.9) 1138.99,1110.24 ccw(c1199.35,1192.91) 1199.35,1090.55 1814.96,1090.55 cw(c1814.96,893.7) 2011.81,893.7 2011.81,539.37 cw(c1814.96,539.37) 1814.96,342.52 1199.35,342.52 ccw(c1199.35,240.16) 1138.99,322.82 1138.99,322.83 cw(c1018.26,488.16) 1018.26,283.44
  region: 1814.58,489.35 1813.47,490.46 1813.47,583.82 1853.11,583.82 1863.11,593.82 1975.74,593.82 1975.74,562.7 1976.11,562.33 1901.22,487.44 1814.46,487.44
  region: 1814.06,945.98 1812.95,944.86 1812.95,851.5 1852.59,851.5 1862.59,841.5 1975.22,841.5 1975.22,872.62 1975.59,872.99 1900.7,947.88 1813.94,947.88
  region: 1535.54,542.55 1586.24,489.72 1698.96,489.72 1698.97,568.78 1698.94,576.88 1624.02,577.24 1624.02,653.62 1563.84,713.8 1563.13,713.09 1535.54,713.09
  region: 1535.45,888.98 1589.29,945.14 1698.8,945.14 1698.8,851.89 1624.6,851.89 1624.6,778.67 1564.42,718.49 1563.72,719.19 1535.45,719.19
  region: 1330.84,200.93 1477.72,200.81 1477.72,465.88 1330.84,465.89
  region: 1331.06,1233.35 1477.94,1233.47 1477.94,971.89 1331.06,971.87
  lines w10: 492.13,1023.62 551.18,1023.62 ; 551.18,964.57 551.18,1023.62 ; 551.18,1082.68 551.18,1023.62 ; 610.24,1023.62 551.18,1023.62 ; 748.03,748.03 807.09,748.03 ; 807.09,688.98 807.09,748.03 ; 807.09,807.09 807.09,748.03 ; 866.14,748.03 807.09,748.03
  text "3002" at 681.01,396.87 h60
Bottom Solder:
  region: 287.4,248.03 ccw(c405.51,248.03) 405.51,129.92 451.85,129.92 ccw(c451.85,248.03) 560.1,200.79 cw(c681.1,153.54) 681.1,283.44 593.04,283.44 cw(c593.04,488.16) 472.31,322.83 472.31,322.82 ccw(c411.95,240.16) 411.95,342.52 287.46,342.52
  region: 287.46,1090.55 287.4,1185.04 cw(c405.51,1185.04) 405.51,1303.15 451.85,1303.15 cw(c451.85,1185.04) 560.1,1232.28 ccw(c681.1,1279.53) 681.1,1149.63 593.04,1149.63 ccw(c593.04,944.9) 472.31,1110.24 cw(c411.95,1192.91) 411.95,1090.55
  region: 961.69,283.44 cw(c961.69,153.54) 1082.69,200.79 ccw(c1190.94,248.03) 1190.94,129.92 1484.25,129.92 1952.76,129.92 ccw(c1952.76,248.03) 2070.87,248.03 2070.87,1185.04 ccw(c1952.76,1185.04) 1952.76,1303.15 1952.75,1303.15 1190.94,1303.15 ccw(c1190.94,1185.04) 1082.69,1232.28 cw(c961.69,1279.53) 961.69,1149.63 1018.26,1149.63 cw(c1018.26,944.9) 1138.99,1110.24 ccw(c1199.35,1192.91) 1199.35,1090.55 1814.96,1090.55 cw(c1814.96,893.7) 2011.81,893.7 2011.81,539.37 cw(c1814.96,539.37) 1814.96,342.52 1199.35,342.52 ccw(c1199.35,240.16) 1138.99,322.82 1138.99,322.83 cw(c1018.26,488.16) 1018.26,283.44
  region: 1455.94,1002.29 1515,1002.29 1515,943.23 1455.94,943.23
  region: 1534.68,1002.29 1593.74,1002.29 1593.74,943.23 1534.68,943.23
  region: 1613.42,1002.29 1672.48,1002.29 1672.48,943.23 1613.42,943.23
  region: 1692.16,1002.29 1751.22,1002.29 1751.22,943.23 1692.16,943.23
  region: 1770.91,1002.29 1829.96,1002.29 1829.96,943.23 1770.91,943.23
  region: 1692.16,1081.03 1751.22,1081.03 1751.22,1021.97 1692.16,1021.97
  region: 1613.42,1081.03 1672.48,1081.03 1672.48,1021.97 1613.42,1021.97
  region: 1534.68,1081.03 1593.74,1081.03 1593.74,1021.97 1534.68,1021.97
  region: 1455.94,1081.03 1515,1081.03 1515,1021.97 1455.94,1021.97
  region: 1770.91,1081.03 1829.96,1081.03 1829.96,1021.97 1770.91,1021.97
Mechanical 1:
  lines w10: 287.4,248.03 ccw(c405.51,248.03) 405.51,129.92 451.85,129.92 ccw(c451.85,248.03) 560.1,200.79 cw(c681.1,153.54) 681.1,283.44 961.69,283.44 cw(c961.69,153.54) 1082.69,200.79 ccw(c1190.94,248.03) 1190.94,129.92 1326.77,129.92 1484.25,129.92 1952.76,129.92 ccw(c1952.76,248.03) 2070.87,248.03 2070.87,1185.04 ccw(c1952.76,1185.04) 1952.76,1303.15 1484.25,1303.15 1326.77,1303.15 1190.94,1303.15 ccw(c1190.94,1185.04) 1082.69,1232.28 cw(c961.69,1279.53) 961.69,1149.63 681.1,1149.63 cw(c681.1,1279.53) 560.1,1232.28 ccw(c451.85,1185.04) 451.85,1303.15 405.51,1303.15 ccw(c405.51,1185.04) 287.4,1185.04 287.46,1090.55 287.46,342.52 287.46,248.03
Mechanical 2:
  circle w2.5: c216.6,-55.12 r1.25
  lines w10: 287.4,248.03 ccw(c405.51,248.03) 405.51,129.92 451.85,129.92 ccw(c451.85,248.03) 560.1,200.79 cw(c681.1,153.54) 681.1,283.44 ; 287.46,248.03 287.46,342.52 ; 681.1,1149.63 cw(c681.1,1279.53) 560.1,1232.28 ccw(c451.85,1185.04) 451.85,1303.15 405.51,1303.15 ccw(c405.51,1185.04) 287.4,1185.04 287.46,1090.55 ; 961.69,283.44 cw(c961.69,153.54) 1082.69,200.79 ccw(c1190.94,248.03) 1190.94,129.92 1326.77,129.92 ; 961.69,1149.63 ccw(c961.69,1279.53) 1082.69,1232.28 cw(c1190.94,1185.04) 1190.94,1303.15 1326.77,1303.15 ; 287.46,342.52 287.46,1090.55 ; 287.46,342.52 411.95,342.52 cw(c411.95,240.16) 472.31,322.82 ccw(c593.04,488.16) 593.04,283.44 1018.26,283.44 ccw(c1018.26,488.16) 1138.99,322.83 cw(c1199.35,240.16) 1199.35,342.52 1326.77,342.52 1326.77,129.92 ; 287.46,1090.55 411.95,1090.55 ccw(c411.95,1192.91) 472.31,1110.24 cw(c593.04,944.9) 593.04,1149.63 1018.26,1149.63 cw(c1018.26,944.9) 1138.99,1110.24 ccw(c1199.35,1192.91) 1199.35,1090.55 1326.77,1090.55 1326.77,1303.15 ; 1326.77,129.92 1484.25,129.92 ; 1326.77,1303.15 1484.25,1303.15 ; 1484.25,129.92 1952.76,129.92 ccw(c1952.76,248.03) 2070.87,248.03 2070.87,1185.04 ccw(c1952.76,1185.04) 1952.76,1303.15 1484.25,1303.15 ; 1484.25,129.92 1484.25,342.52 1814.96,342.52 ccw(c1814.96,539.37) 2011.81,539.37 2011.81,893.7 ccw(c1814.96,893.7) 1814.96,1090.55 1484.25,1090.55 1484.25,1303.15
Mechanical 15:
  circle w10: c149.61,149.61 r70.87
  circle w10: c2208.66,992.13 r68.9
  circle w10: c2208.66,440.95 r68.9
  circle w10: c2208.66,992.13 r68.9
  circle w10: c956.69,1283.47 r68.9
  circle w10: c681.1,1283.47 r68.9
  circle w10: c681.1,149.61 r68.9
  circle w10: c956.69,149.61 r68.9
  circle w10: c149.61,1283.47 r70.87
  circle w10: c2208.66,149.61 r68.9
  circle w10: c2208.66,1283.47 r68.9
  circle w10: c2208.66,716.54 r68.9
  lines w10: 0,0 2358.27,0 2358.27,1433.07 0,1433.07 0,0 ; 283.52,204.72 ccw(c362.26,204.72) 362.26,125.98 451.85,125.98 ccw(c451.85,244.09) 560.1,196.85 cw(c681.1,149.6) 681.1,279.5 961.69,279.5 cw(c961.69,149.6) 1082.69,196.85 ccw(c1190.94,244.09) 1190.94,125.98 1484.25,125.98 1996.06,125.98 ccw(c1996.06,204.72) 2074.8,204.72 2074.8,1228.34 ccw(c1996.06,1228.34) 1996.06,1307.08 1484.25,1307.08 1190.94,1307.08 ccw(c1190.94,1188.97) 1082.69,1236.22 cw(c961.69,1283.46) 961.69,1153.57 681.1,1153.57 cw(c681.1,1283.46) 560.1,1236.22 ccw(c451.85,1188.97) 451.85,1307.08 362.26,1307.08 ccw(c362.26,1228.34) 283.52,1228.34 283.52,1094.49 283.52,338.58 283.52,204.72

## Dimensions
1952.75,1303.15 to 1952.76,129.92 on Mechanical 1
287.4,1185.04 to 2070.87,1185.04 on Mechanical 1